# Altium PCB PCB.PcbDoc
Units mm, origin at the board's own origin, x right, y up, seen from the top; angles counter-clockwise.
Board outline 150 x 80 mm, 2 copper layers (Top Layer, Bottom Layer); 43 components, 36 nets, 216 pads, 52 vias.
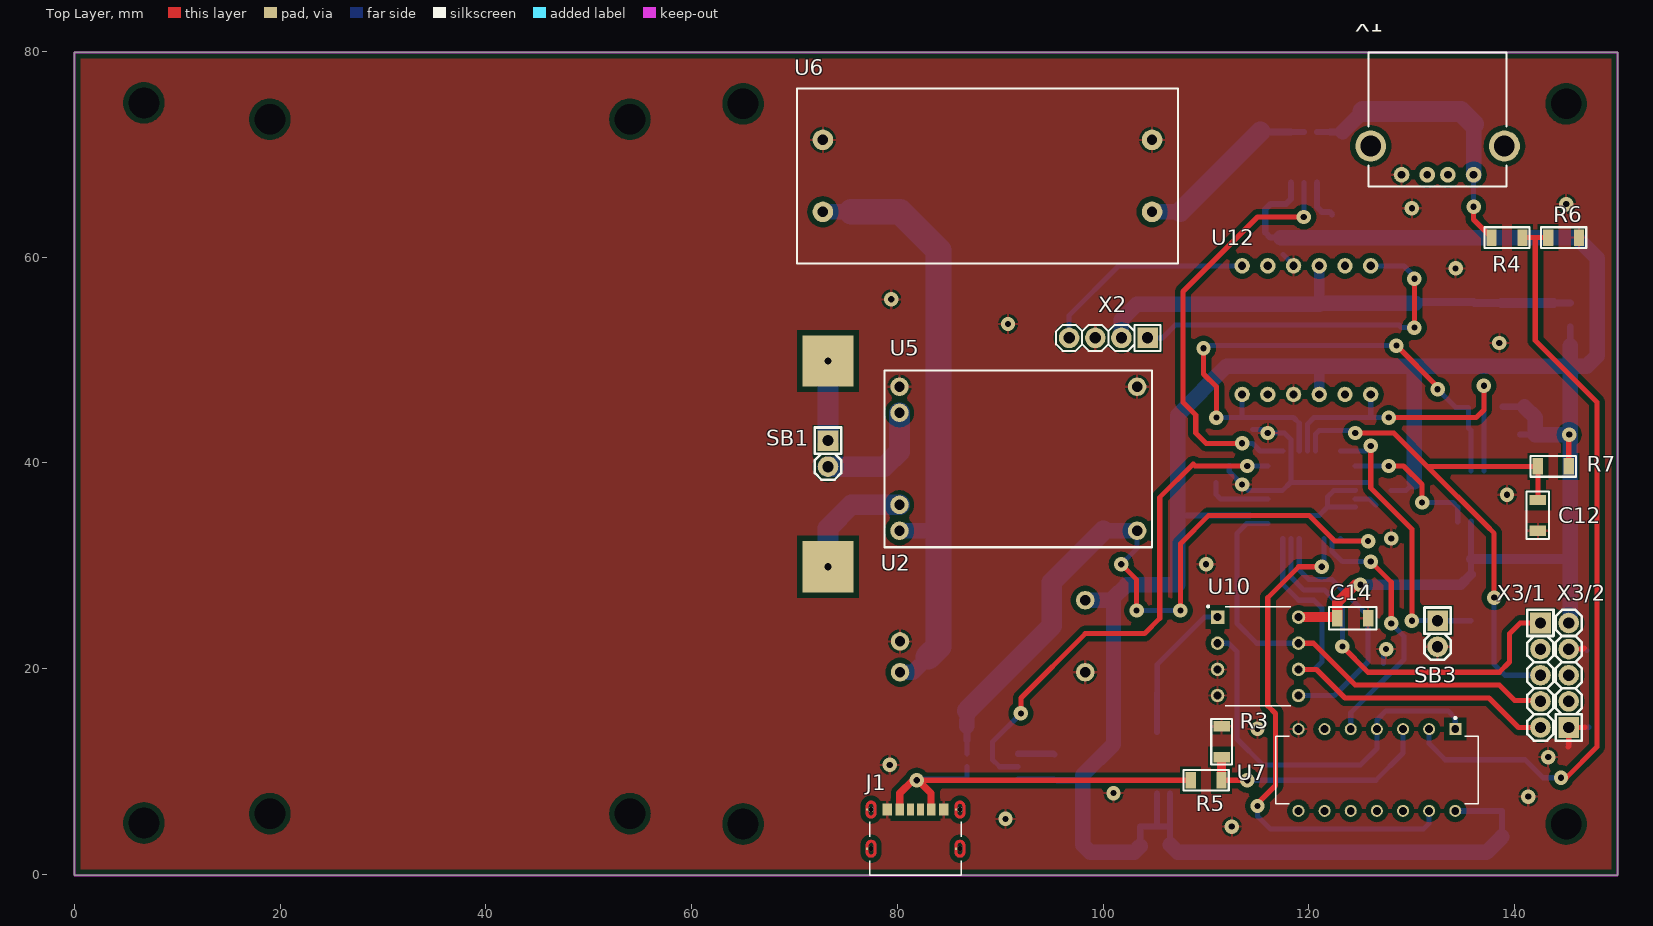
[diagram p0: Top Layer view]
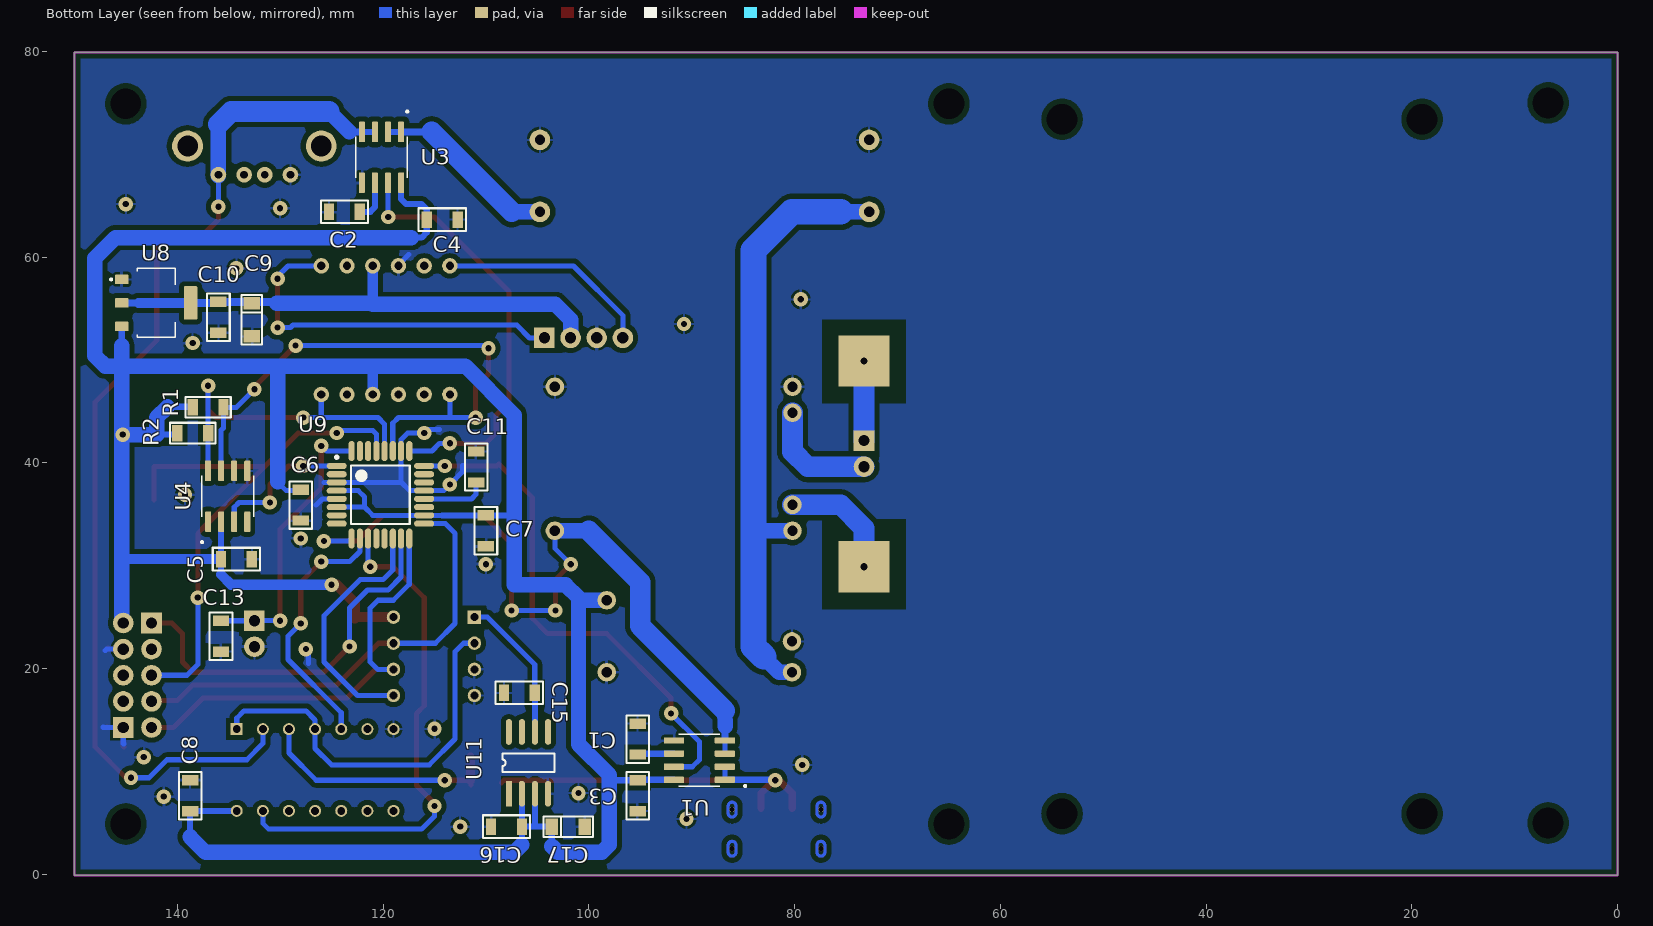
[diagram p1: Bottom Layer view, seen from below]
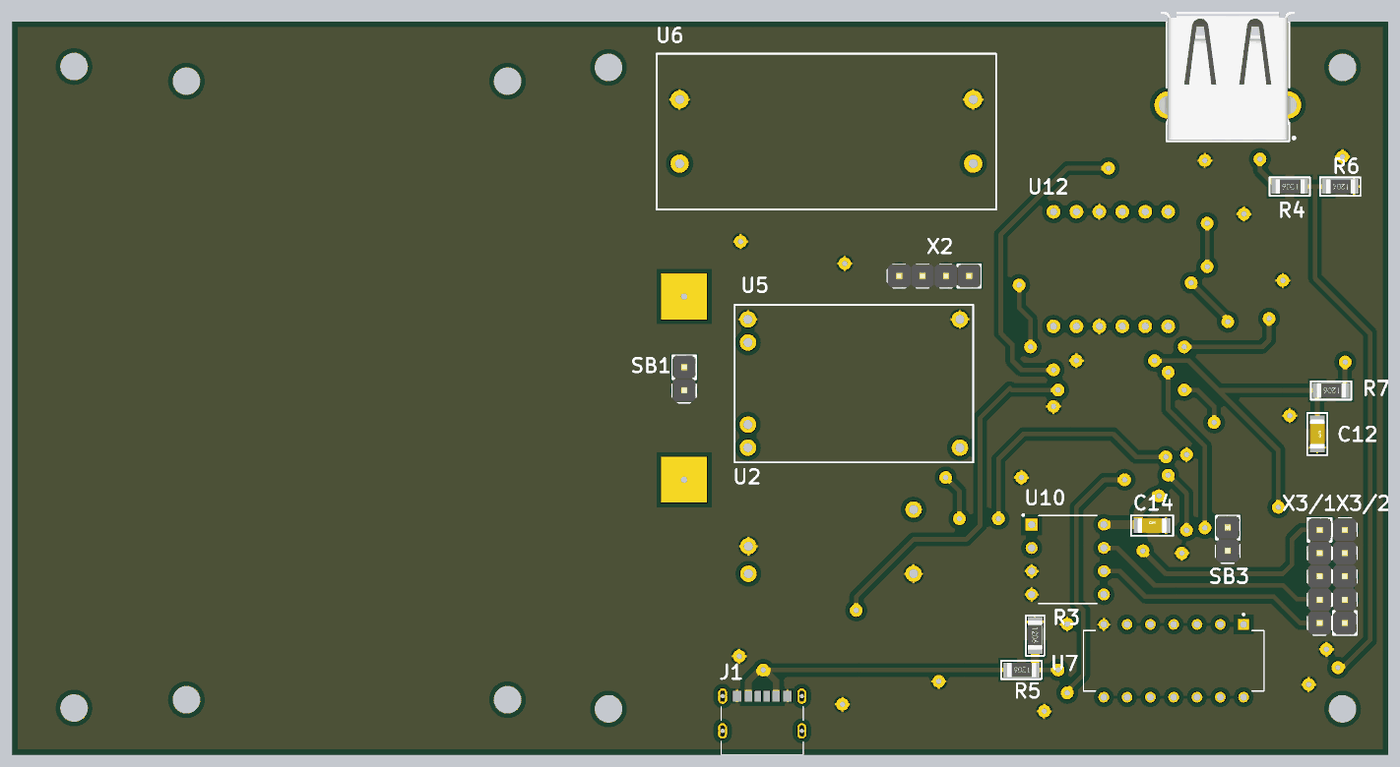
[diagram p2: 3D render of the assembled board from above, using the file's embedded part models]
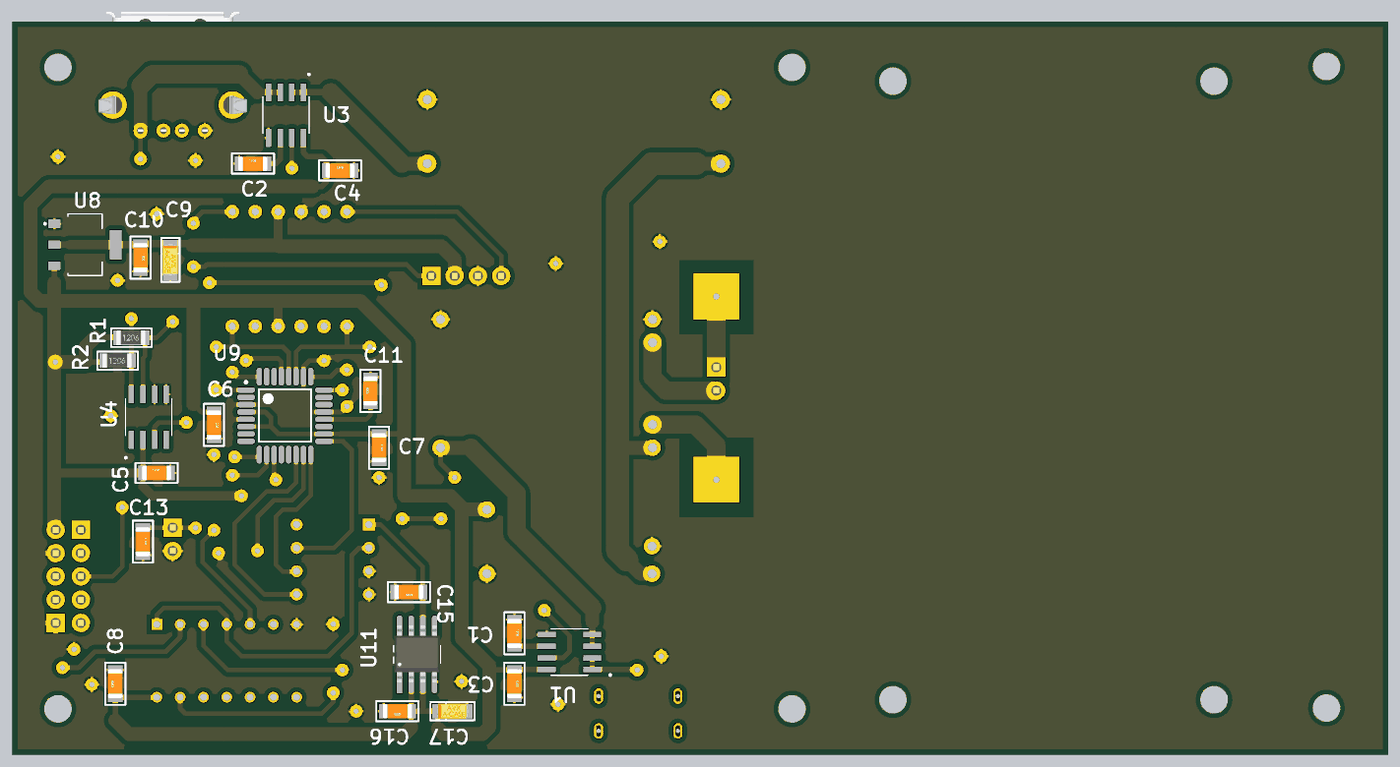
[diagram p3: 3D render of the assembled board from below, using the file's embedded part models]

## Layer stack, top to bottom
Top Solder: solder mask 0.0102, Solder Resist, Dk 3.5
Top Layer: signal copper 0.0356
Dielectric 1: dielectric 0.32, FR-4, Dk 4.8
Bottom Layer: signal copper 0.0356
Bottom Solder: solder mask 0.0102, Solder Resist, Dk 3.5

## Board outline
0,-0.1 150,-0.1 150,79.903 0,79.903

## Design rules (kind name [scope] priority, off if disabled: settings)
Clearance [All] p1: gap=0.1 ignorepadtopadclearanceinfootprint=TRUE except(0.5: Arc-Fill Arc-Poly Arc-Region Track-Fill Track-Poly Track-Region SMDPad-Fill SMDPad-Poly SMDPad-Region THPad-Fill THPad-Poly THPad-Region Via-Fill Via-Poly Via-Region Fill-Fill Fill-Poly Fill-Region Poly-Poly Poly-Region Region-Region)
PolygonConnect [All] p1: connectstyle=Relief reliefconductorwidth=0.254 reliefentries=4 polygonreliefangle="90 Angle" airgapwidth=0.254
RoutingVias [All] p1: holewidth=0.711 width=1.27 viastyle="Through Hole" minholewidth=0.711 minwidth=1.27 maxholewidth=0.711 maxwidth=1.27
SolderMaskExpansion [All] p1: expansion=0.102
Width [All] p1: maxlimit=5 minlimit=0.3 preferedwidth=0.5
30 further rules are at their usual default settings.

## Classes and differential pairs
component class SchemeP1: C1 C2 C3 C4 C5 C6 C7 C8 C10 C11 C12 C13 C14 C15 C17 J1 R1 R2 R3 R4 R5 R6 R7 U1 U2 U3 U4 U5 U6 U7 U8 U9 U10 U11 X1 X2

## Components (designator, comment, footprint, x,y, rotation, side; value= is the part's Value field where it differs from the comment)
C1 "1nF" CH1206C 95.25,13.153 r270 bottom value=0.1uF
C2 "1nF" CH1206C 123.75,64.403 r180 bottom value=0.1uF
C3 "0.1uF" CH1206C 95.25,7.653 r270 bottom
C4 "0.1uF" CH1206C 114.25,63.653 r180 bottom
C5 "0.1uF" CH1206C 134.25,30.653 r180 bottom
C6 "0.1uF" CH1206C 128,35.903 r270 bottom
C7 "0.1uF" CH1206C 110,33.403 r270 bottom
C8 "0.1uF" CH1206C 138.75,7.653 r90 bottom
C9 "Comment" "CAP: TANTAL-A" 132.75,53.903 r270 bottom
C10 "0.1uF" CH1206C 136,54.153 r270 bottom
C11 "0.1uF" CH1206C 110.95,39.603 r90 bottom
C12 "0.1uF" CH1206C 142.25,34.903 r270 top
C13 "0.1uF" CH1206C 135.75,23.153 r270 bottom
C14 "0.1uF" CH1206C 124.25,24.903 r0 top
C15 "0.1uF" CH1206C 106.75,17.653 r0 bottom
C16 "Comment" "CAP: TANTAL-A" 102,4.653 r180 bottom
C17 "0.1uF" CH1206C 108,4.653 r0 bottom
J1 "UJC-HP-3-SMT-TR" CUI_UJC-HP-3-SMT-TR 81.755,6.3 r0 top
R1 "Resistor film, 10k, ±5%, 1206, 0.25W, -55...+125°C" "RES: 1206" 137,45.403 r180 bottom value=10k
R2 "Resistor film, 10k, ±5%, 1206, 0.25W, -55...+125°C" "RES: 1206" 138.5,42.903 r180 bottom value=10k
R3 "Resistor film, 10k, ±1%, 1206, 0.25W, -55...+125°C" "RES: 1206" 110,9.153 r180 top value=10k
R4 "Resistor film, 10k, ±1%, 1206, 0.25W, -55...+125°C" "RES: 1206" 139.25,61.903 r180 top value=10k
R5 "Resistor film, 10k, ±1%, 1206, 0.25W, -55...+125°C" "RES: 1206" 111.5,12.903 r270 top value=10k
R6 "Resistor film, 10k, ±1%, 1206, 0.25W, -55...+125°C" "RES: 1206" 144.75,61.903 r180 top value=10k
R7 "Resistor film, 10k, ±5%, 1206, 0.25W, -55...+125°C" "RES: 1206" 143.75,39.653 r180 top value=10k
SB1 "Comment" "CON: PLS-2" 73.25,40.903 r270 top
SB3 "Comment" "CON: PLS-2" 132.5,23.403 r270 top
U1 "ACS712ELCTR-05B-T" SOIC127P600X175-8N#1 89.25,11.103 r0 bottom
U2 "DC_DC" DC_DC 80.25,22.653 r0 top
U3 "ACS712ELCTR-05B-T" SOIC127P600X175-8N#1 120.15,69.703 r270 bottom
U4 "DS3231MZ+" SOIC127P600X175-8N#2 135.1,36.753 r90 bottom
U5 "Comment" TP4056_module 91.75,40.403 r0 top
U6 "Comment" CONV_RAZ-2405S 102.25,42.803 r180 top
U7 "К176КТ1" DIP794W45P254L1969H508Q14 126.6,10.153 r270 top
U8 "AMS1117-3.3" SOT229P700X180-4N 142.05,55.553 r270 bottom
U9 "ATmega328P-AU" 32A_M 120.25,36.903 r180 bottom
U10 "MCP3201-CI/P" DIP787W46P254L927H533Q8 115.05,21.203 r0 top
U11 "REF192GRUZ" "SOIC_N-8 - duplicate1" 107.77,7.853 r90 bottom
U12 "Comment" Logic_lvl_conv 113.5,46.653 r90 top
X1 "\"USB\"" "CON: USB-A" 132.5,69.403 r180 top
X2 "Connector, 4pin, 2.54mm, 500VAC, 3A" "CON: PLS-4" 100.5,52.153 r180 top
X3/1 "Comment" "CON: PLS-5"#1 142.5,19.363 r270 top
X3/2 "Comment" "CON: PLS-5"#2 145.25,19.363 r90 top

## Footprints (in the part's own frame and the unit in brackets; to place one, negate y for a bottom-side part, rotate by r counter-clockwise, add the part's x,y. Pads: shape width x height; smd on the part's side, far side on the other; paste and mask are expansions set on the pad)
32A_M [mm] "Thin QFP, 32-Leads, Body 7x7mm, Pitch 0.8mm, IPC Low Density"
  oval 1.95x0.6 smd: 1(-4.25,2.8) 2(-4.25,2) 3(-4.25,1.2) 4(-4.25,0.4) 5(-4.25,-0.4) 6(-4.25,-1.2) 7(-4.25,-2) 8(-4.25,-2.8) 17(4.25,-2.8) 18(4.25,-2) 19(4.25,-1.2) 20(4.25,-0.4) 21(4.25,0.4) 22(4.25,1.2) 23(4.25,2) 24(4.25,2.8)
  oval 0.6x1.95 smd: 9(-2.8,-4.25) 10(-2,-4.25) 11(-1.2,-4.25) 12(-0.4,-4.25) 13(0.4,-4.25) 14(1.2,-4.25) 15(2,-4.25) 16(2.8,-4.25) 25(2.8,4.25) 26(2,4.25) 27(1.2,4.25) 28(0.4,4.25) 29(-0.4,4.25) 30(-1.2,4.25) 31(-2,4.25) 32(-2.8,4.25)
  silkscreen extent -4.38,-2.85 2.85,3.77, body extent -3.5,-3.5 3.5,3.5, height 1.2
"CAP: TANTAL-A" [mm]
  rect 1.2x1.6 smd: 1(-1.6,0) 2(1.6,0)
  silkscreen extent -2.4,-1 2.4,1, body extent -1.7,-0.84 1.7,0.84, height 1.71
CH1206C [mm] "Non polar chip capacitor, size 1206"
  rect 1x1.6 smd: 1(-1.5,0) 2(1.5,0)
  silkscreen extent -2.3,-1.1 2.3,1.1, body extent -1.6,-0.8 1.6,0.8, height 1
"CON: PLS-2" [mm]
  rect 2x2 hole 1.1: 1(-1.27,0)
  round 2 hole 1.1: 2(1.27,0)
  silkscreen extent -2.54,-1.27 2.54,1.27, body extent -2.57,-1.28 2.51,1.26, height 8.54
"CON: PLS-4" [mm] "PLS-40 4 pin header"
  rect 2x2 hole 1.1: 1(-3.81,0)
  round 2 hole 1.1: 2(-1.27,0) 3(1.27,0) 4(3.81,0)
  silkscreen extent -5.08,-1.27 5.08,1.27, body extent -5.08,-1.27 5.08,1.27, height 8.54
"CON: PLS-5"#1 [mm]
  rect 2x2 hole 1.1: 1(-5.08,0)
  round 2 hole 1.1: 3(-2.54,0) 5(0,0) 7(2.54,0) 9(5.08,0)
  silkscreen extent -6.35,-1.27 6.35,1.27, body extent -6.35,-1.27 6.35,1.27, height 8.54
"CON: PLS-5"#2 [mm]
  round 2 hole 1.1: 2(5.08,0) 4(2.54,0) 6(0,0) 8(-2.54,0)
  rect 2x2 hole 1.1: 10(-5.08,0)
  silkscreen extent -6.35,-1.27 6.35,1.27, body extent -6.35,-1.27 6.35,1.27, height 8.54
"CON: USB-A" [mm]
  round 1.524 hole 0.762: 1(-3.5,1.397) 2(-1,1.397) 3(1,1.397) 4(3.5,1.397)
  round 3 hole 2: 5(6.5,-1.397) 6(-6.5,-1.397)
  round 0.5 on Mech1: ""(-7.5,1.9)
  round 0.5 on Top Overlay: ""(-7.2,2.2)
  silkscreen extent -6.7,-10.5 6.7,2.55, body extent -8.1,-11.59 8.13,2.41, height 7.66
CONV_RAZ-2405S [mm]
  round 2 hole 1: 1(29.5,-21.6) 2(-2.5,-21.6) 3(-2.5,-28.6) 4(29.5,-28.6)
  silkscreen extent -5,-33.6 32,-16.6
CUI_UJC-HP-3-SMT-TR [mm]
  rect 0.7x1.15 smd: A5(-0.5,0) B5(0.5,0)
  rect 0.8x1.15 smd: A9(1.52,0) B9(-1.52,0)
  rect 0.9x1.15 smd: A12(2.75,0) B12(-2.75,0)
  rect 0.2x0.2 smd paste-1 mask+0: S1(-4.695,0) S2(3.945,0) S3(-4.695,-3.8) S4(3.945,-3.8)
  round 0.5 hole 0.5 unplated: ""(-4.32,-3.8) ""(-4.32,0) ""(4.32,-3.8) ""(4.32,0)
  Top Layer region: 249 vertices and 0 holes, not listed, extent -4.82,-0.85 -3.82,0.85
  Top Layer region: 249 vertices and 0 holes, not listed, extent 3.82,-0.85 4.82,0.85
  Top Layer region: 249 vertices and 0 holes, not listed, extent -4.82,-4.65 -3.82,-2.95
  Top Layer region: 249 vertices and 0 holes, not listed, extent 3.82,-4.65 4.82,-2.95
  Bottom Layer region: 249 vertices and 0 holes, not listed, extent -4.82,-0.85 -3.82,0.85
  Bottom Layer region: 249 vertices and 0 holes, not listed, extent 3.82,-0.85 4.82,0.85
  Bottom Layer region: 249 vertices and 0 holes, not listed, extent -4.82,-4.65 -3.82,-2.95
  Bottom Layer region: 249 vertices and 0 holes, not listed, extent 3.82,-4.65 4.82,-2.95
  silkscreen extent -4.47,-6.4 4.47,-1.17
DC_DC [mm]
  round 1.8 hole 1: 1(0,0) 2(0,-3) 3(18,-3) 4(18,4)
DIP787W46P254L927H533Q8 [mm]
  rect 1.308x1.308 hole 0.8: 1(-3.935,3.81)
  round 1.308 hole 0.8: 2(-3.935,1.27) 3(-3.935,-1.27) 4(-3.935,-3.81) 5(3.935,-3.81) 6(3.935,-1.27) 7(3.935,1.27) 8(3.935,3.81)
  silkscreen extent -4.95,-4.8 3.18,4.95
DIP794W45P254L1969H508Q14 [mm]
  rect 1.17x1.17 hole 0.77: 1(-3.97,7.62)
  round 1.17 hole 0.77: 2(-3.97,5.08) 3(-3.97,2.54) 4(-3.97,0) 5(-3.97,-2.54) 6(-3.97,-5.08) 7(-3.97,-7.62) 8(3.97,-7.62) 9(3.97,-5.08) 10(3.97,-2.54) 11(3.97,0) 12(3.97,2.54) 13(3.97,5.08) 14(3.97,7.62)
  silkscreen extent -5.15,-9.84 3.3,9.84
Logic_lvl_conv [mm]
  round 1.5 hole 0.8: 1(0,0) 2(0,-2.5) 3(0,-5) 4(0,-7.5) 5(0,-10) 6(0,-12.5) 7(12.5,-12.5) 8(12.5,-10) 9(12.5,-7.5) 10(12.5,-5) 11(12.5,-2.5) 12(12.5,0)
"RES: 1206" [mm]
  rect 1x1.6 smd: 1(-1.5,0) 2(1.5,0)
  silkscreen extent -2.2,-1 2.2,1, body extent -1.65,-0.8 1.55,0.8, height 0.47
SOIC127P600X175-8N#1 [mm]
  rrect25% 1.97x0.6 smd: 1(-2.475,1.905) 2(-2.475,0.635) 3(-2.475,-0.635) 4(-2.475,-1.905) 5(2.475,-1.905) 6(2.475,-0.635) 7(2.475,0.635) 8(2.475,1.905)
  silkscreen extent -4.54,-2.52 2,2.6
SOIC127P600X175-8N#2 [mm]
  rrect25% 1.97x0.59 smd: 1(-2.475,1.905) 2(-2.475,0.635) 3(-2.475,-0.635) 4(-2.475,-1.905) 5(2.475,-1.905) 6(2.475,-0.635) 7(2.475,0.635) 8(2.475,1.905)
  silkscreen extent -4.54,-2.52 2,2.59
"SOIC_N-8 - duplicate1" [mm]
  rect 2.5x0.6 smd: 1(0,0)
  oval 2.5x0.6 smd: 2(0,-1.27) 3(0,-2.54) 4(0,-3.81) 5(6,-3.81) 6(6,-2.54) 7(6,-1.27) 8(6,0)
  silkscreen extent 2.08,-4.44 3.92,0.63, body extent -0.05,-4.4 6.15,0.6, height 1.75
SOT229P700X180-4N [mm]
  rrect15% 0.93x1.31 smd: 1(-2.29,-3.345) 2(0,-3.345) 3(2.29,-3.345)
  rrect15% 3.24x1.31 smd: 4(0,3.345)
  silkscreen extent -3.36,-4.47 3.36,1.86
TP4056_module [mm]
  round 1.8 hole 1: 1(11.55,7) 2(-11.55,7) 3(-11.55,4.475) 4(-11.55,-4.475) 5(-11.55,-7) 6(11.55,-7)
  silkscreen extent -13,-8.6 13,8.6

## Part data
C1 C2 C3 C4 C5 C6 C7 C8 C10 C11 C12 C13 C14 C15 C17: library part Capacitor
J1: "Type C, 3 A, Right Angle, Surface Mount _SMT_, Power Only USB Receptacle", Package=Package, Availability=Unavailable, MF="CUI Devices", MP=UJC-HP-3-SMT-TR, Price=None, SnapEDA_Link=https://www.snapeda.com/parts/UJC-HP-3-SMT-TR/CUI%20Devices/view-part/4722774/?ref=snap
R1 R2 R7: library part Resistor_1206, Manufacturer=Yageo, Package=1206, PartNumber=RC1206JR-07100RL, Power=0.25W, Temperature=-55...+125°C, Tolerance=±5%, TypeResistor="Resistor film", HelpURL=https://www.digikey.com/product-detail/en/yageo/RC1206JR-07100RL/311-100ERCT-ND/732153, ValueManufacturerPartNumber="Resistor film, 10k, ±5%, 1206, 0.25W, -55...+125°C"
R3 R4 R5 R6: library part Resistor_1206, Manufacturer=Yageo, Package=1206, PartNumber=RC1206JR-07100RL, Power=0.25W, Temperature=-55...+125°C, Tolerance=±1%, TypeResistor="Resistor film", HelpURL=https://www.digikey.com/product-detail/en/yageo/RC1206JR-07100RL/311-100ERCT-ND/732153, ValueManufacturerPartNumber="Resistor film, 10k, ±1%, 1206, 0.25W, -55...+125°C"
U1 U3: "Current Sensor 5A 1 Channel Hall Effect, Open Loop Bidirectional 8-SOIC _0.154, 3.90mm Width_", Package="SOIC-8 Allegro MicroSystems LLC", Digi-Key_Part_Number=620-1189-1-ND, Digi-Key_Purchase_URL=https://www.digikey.in/product-detail/en/allegro-microsystems/ACS712ELCTR-05B-T/620-1189-1-ND/1284606?utm_source=snapeda&utm_medium=aggregator&utm_campaign=symbol, MF="Allegro MicroSystems LLC", MP=ACS712ELCTR-05B-T, SnapEDA_Link=https://www.snapeda.com/parts/ACS712ELCTR-05B-T/Allegro%20MicroSystems%20LLC/view-part/46765/?ref=snap
U4: "Real Time Clock _RTC_ IC Clock/Calendar IA?C, 2-Wire Serial 8-SOIC _0.154, 3.90mm Width_", Package="SOIC-8 Maxim Integrated", Availability=Unavailable, MF="Maxim Integrated", MP=DS3231MZ, Price=None, SnapEDA_Link=https://www.snapeda.com/parts/DS3231MZ/Maxim%20Integrated/view-part/2834343/?ref=snap
U7: library part CD4016BE, "100-pA, 20-V, 1:1 (SPST), 4-channel analog switch 14-PDIP -55 to 125", Package="PDIP-14 Texas Instruments", Availability=Good, DigiKey-Purchase-URL=https://snapeda.com/shop?store=DigiKey&id=339386, MF="Texas Instruments", Mouser-Purchase-URL=https://snapeda.com/shop?store=Mouser&id=339386, MP=CD4016BE, Price=None, SnapEDA_Link=https://www.snapeda.com/parts/CD4016BE/Texas%20Instruments/view-part/339386/?ref=snap, Texas_Instruments-Purchase-URL=https://snapeda.com/shop?store=Texas+Instruments&id=339386
U8: "Sot223/Pkg 1-Amp 3.3-Volt Low Drop Out Voltage Regulatator", Package=None, Availability=Unavailable, MF="Advanced Monolithic Systems", MP=AMS1117-3.3, Price=None, SnapEDA_Link=https://www.snapeda.com/parts/AMS1117-3.3/Advanced%20Monolithic%20Systems/view-part/53450/?ref=snap
U9: "8-bit AVR Microcontroller, 32KB Flash, 1KB EEPROM, 2KB SRAM, 32-pin TQFP, Industrial Grade (-40°C to 85°C)", Supplier Part Number 1=ATMEGA328P-AU-ND, Code_JEDEC=MS-026-ABA, ComponentLink1Description="Manufacturer Link", ComponentLink1URL=http://www.atmel.com/products/avr/default.asp?, ComponentLink2Description="ATmega48A/48PA/88A/88PA/168A/168PA/328/328P Datasheet", ComponentLink2URL=http://www.atmel.com/dyn/resources/prod_documents/8271.pdf, ComponentLink3Description="ATmega48A/48PA/88A/88PA/168A/168PA/328/328P Summary", ComponentLink3URL=http://www.atmel.com/dyn/resources/prod_documents/8271S.pdf, ComponentLink4Description="Atmel.com Home", ComponentLink4URL=http://www.atmel.com, DatasheetVersion="revA, Jan-2010", PackageDescription="32-Lead, 7x7x1.0 mm Body, 0.8mm Lead Pitch, Thin Profile Plastic Quad Flat Package (TQFP)", PackageReference=32A, PackageVersion="revB, Oct-2001", Published=1-Apr-2010, Publisher="Altium Limited", Supplier 1=Digi-Key, Supplier 2=Farnell, Supplier 3=Mouser, Supplier Part Number 2=1715486, Supplier Part Number 3=556-ATMEGA328P-AU
U10: "12 Bit Analog to Digital Converter 1 Input 1 SAR 8-PDIP", Package="DIP-8 Microchip", Availability=Unavailable, MF=Microchip, MP=MCP3201-CI/P, Price=None, SnapEDA_Link=https://www.snapeda.com/parts/MCP3201-CI/P/Microchip/view-part/228355/?ref=snap
U11: "Series Voltage Reference IC A±0.4% 8-TSSOP", Package="TSSOP-8 Analog Devices", Availability=Unavailable, DigiKey-Purchase-URL=https://snapeda.com/shop?store=DigiKey&id=281738, MF="Analog Devices", MP=REF192GRUZ, Price=None, SnapEDA_Link=https://www.snapeda.com/parts/REF192GRUZ/Analog%20Devices%20Inc./view-part/281738/?ref=snap
X1: library part USB-A, "USB", Manufacturer="TE Connectivity", ComponentKind="type A", HelpURL=https://www.digikey.com/product-detail/en/te-connectivity-amp-connectors/292303-2/A105221-ND/953990, Model=292303-2
X2: library part PLS-4, CurrentMax=3A, Manufacturer=Connfly, VoltageMax=500VAC, CommentText="\"Display", HelpURL=https://www.chipdip.ru/product/pls-4, Multichannel=4pin, PartNumber=PLS-4, Pitch=2.54mm, TypeConnector=Connector, ValueManufacturerPartNumber="Connector, 4pin, 2.54mm, 500VAC, 3A"

## Free pads (board coordinates)
  round 1.8 hole 3: 5(54,5.903) 5(54,73.403) 6(19,5.903) 6(19,73.403)
  rect 5x5 hole 0.7: 7(73.25,49.903) 8(73.25,29.903)
  round 1.5 hole 3: 9(6.75,5) 10(6.75,75) 11(145,74.903) 12(145,4.903) 13(65,4.903) 14(65,74.903)

## Via types
v1: diameter 1.4, hole 0.6, Top Layer to Bottom Layer, 52 vias

## Nets (pads, with @x,y where several pads share a name; then routed paths per layer and width w, separated by ;. In a path a pad name is that pad's centre, name@x,y a point inside that pad or via, vN(x,y) a via of type N, cw(c..) or ccw(c..) an arc to the next point about the centre after c; other vN are vias at no path point)
1Hz_Wave: U4.3 U9.1 | length 14.4
  Top Layer w0.5: v1(127.75,39.703) 129.2,39.703 131,37.903 v1(131,36.153)
  Bottom Layer w0.5: U9.1 v1(127.75,39.703) ; v1(131,36.153) 131,35.903 131.25,36.153 134,36.153 134.465,35.688 U4.3
+3.3V: C9.1 C10.1 U8.2 U8.4 U12.9 X2.2 | length 49.8
  Bottom Layer w0.35: C10.1 C10.1@136.1,55.553
  Bottom Layer w0.7: 143.75,55.553 U8.2
  Bottom Layer w0.8: 130.35,55.653 C10.1 ; C10.1@136.1,55.553 U8.4
  Bottom Layer w1: 121,55.403 121,55.503 U12.9 ; U8.4 143.75,55.553
  Bottom Layer w1.5: X2.2 101.77,53.923 103.25,55.403 121,55.403 ; 121,55.503 130.35,55.503
+5V: C3.1 C4.1 C5.1 C6.1 C7.1 C8.1 C14.1 C16.1 C17.1 R1.1 R2.1 R7.1 U1.8 U2.4 U3.8 U4.2 U7.14 U8.3 U9.4 U9.6 U9.18 U10.8 U11.2 U11.3 U12.4 X3/2.2 | length 322.7
  Top Layer w0.5: R7.1 145.25,42.708 v1(145.295,42.753)
  Top Layer w1: U10.8 C14.1@122.75,25.013 ; C14.1 C14.1@122.75,25.013 ; v1(125,28.153) 124.5,28.153 122.75,26.403 C14.1@122.75,25.013
  Bottom Layer w0.35: C3.1@95.205,9.198 C3.1 ; 105.23,4.673 105.25,4.653 ; U9.4 U9.4@124.571,37.374 ; C5.1@135.7,30.753 C5.1@135.735,30.788 ; v1(145.295,42.753) v1@145.395,42.653
  Bottom Layer w0.5: 114.25,34.903 U9.18 121,34.903 121.8,35.703 ; U9.6 121.8,35.703 ; U9.4 122.4,37.303 121.8,36.703 121.8,35.703 ; C6.1@128,37.303 129.4,37.303 130.25,38.153 ; U7.14 U7.14@134.25,6.153 ; 144.895,49.403 145.395,48.903
  Bottom Layer w0.6: U1.8 C3.1@95.205,9.198 ; C3.1@95.5,9.153 97.5,9.153 ; 103.6,2.753 C16.1 105.25,4.653 C17.1 ; 105.23,4.673 U11.3 ; 106.5,2.903 C17.1 ; U11.2 C17.1 ; 107.25,34.903 C7.1 110.95,34.903 114.25,34.903 ; 117.25,61.903 116.25,61.903 115.75,62.403 C4.1 115.75,64.653 116.25,65.153 117.75,65.153 118.245,65.648 U3.8 ; U7.14@134.25,6.153 C8.1 138.75,3.653 ; C5.1@135.735,30.788 U4.2 ; 135.75,29.153 C5.1 ; R1.1@138.8,45.453 140.95,45.453 ; 140.5,42.753 142,42.753 ; 145.395,51.403 U8.3
  Bottom Layer w1: U12.4 121,49.403 ; v1(125,28.153) 134.75,28.153 135.75,29.153 ; C5.1 145.395,30.653
  Bottom Layer w1.5: U2.4 101,26.653 101,12.653 98,9.653 98,2.903 98.75,2.153 103,2.153 103.6,2.753 ; 101,26.903 102.25,28.153 107.25,28.153 107.25,34.903 107.25,44.653 112,49.403 121,49.403 130.25,49.403 ; 106.5,2.903 107.25,2.153 137.25,2.153 138.75,3.653 ; 117.25,61.903 146,61.903 148,59.903 148,50.403 147,49.403 145.395,49.403 145.395,51.403 ; 130.25,38.153 130.25,49.403 ; 140.95,45.453 142,44.403 142,42.753 v1(145.295,42.753) ; 144.895,49.403 130.25,49.403 ; X3/2.2@145.395,24.443 145.395,30.653 145.395,42.653 145.395,48.903
BAT+: pad.8 U5.4 | length 11.6
  Bottom Layer w2: pad.8 73.25,33.653 75.525,35.928 U5.4
BAT-: pad.7 SB1.1 | length 7.7
  Bottom Layer w2: SB1.1 pad.7
CLK: 
CS: U9.14 U10.5 | length 24.2
  Bottom Layer w0.5: U10.5 122.49,17.393 125.75,20.653 125.75,25.153 122.25,28.653 120,28.653 119.05,29.603 U9.14
GND: C1.1 C2.1 C3.2 C4.2 C5.2 C6.2 C7.2 C8.2 C9.2 C10.2 C11.2 C12.2 C13.2 C14.2 C15.2 C16.2 C17.2 J1.A12 J1.B12 R5.1 R6.1 SB3.2 U1.5 U2.1 U2.3 U3.5 U4.5 U4.6 U5.1 U5.2 U6.3 U6.4 U7.7 U8.1 U9.3 U9.5 U9.21 U9.26 U10.3 U10.4 U11.4 U12.3 U12.10 X1.4 X2.3 X3/2.4 X3/2.10 | length 39.1
  Top Layer w0.5: 145.2,12.4 145.25,12.45 X3/2.10 146.783,14.283 146.8,14.3 ; X3/2.4 146.653,21.903 146.75,22
  Bottom Layer w0.5: 112.25,39.75 112.25,39.153 v1(113.5,37.903) 114.1,37.303 U9.21 117.4,37.303 118.25,38.153 ; 114.5,43.25 115.653,43.25 v1(116,42.903) 117.6,42.903 118.25,42.253 U9.26 118.25,38.153 ; 117.5,60.25 118.5,59.25 U12.10 ; U9.5 125.9,36.503 126.5,35.903 ; 125.73,38.103 U9.3 118.3,38.103 118.25,38.153 ; 127.253,20.5 127.253,21.656 v1(127.5,21.903) ; 145.2,12.7 145.25,12.75 X3/2.10 147.183,14.283 147.2,14.3 ; X3/2.4 146.847,21.903 147,21.75
  other v1: 112.5,4.653 90.5,5.403 141.314,7.566 101,7.903 79.25,10.653 143.25,11.403 115,14.153 110,30.153 128,32.653 139.25,36.903 138.5,51.653 90.75,53.5 79.4,55.9 134.25,58.903 130,64.75 145,65.153
I_IN: U1.7 U9.24 | length 50.3
  Top Layer w0.5: v1(92,15.653) 92,17.153 98.25,23.403 104,23.403 105.5,24.903 105.5,36.653 108.75,39.903 108.95,39.703 v1(114,39.703)
  Bottom Layer w0.5: U1.7 89.935,10.468 89.25,11.153 89.25,12.903 v1(92,15.653) ; v1(114,39.703) U9.24
I_OUT: U3.7 U9.25 | length 41.1
  Top Layer w0.5: v1@113.25,41.903 110,41.903 109,42.903 109,44.653 107.75,45.903 107.75,56.653 115,63.903 v1(119.5,63.903)
  Bottom Layer w0.5: v1(113.5,41.903) 114.5,41.903 115.25,41.153 U9.25 ; v1@119.25,64.153 119.515,64.418 U3.7
IN_SW: U7.5 U9.10 | length 25.2
  Top Layer w0.5: v1(126,30.403) 128,28.403 v1(128,24.403)
  Bottom Layer w0.5: U9.10 122.25,31.403 123.25,30.403 v1(126,30.403) ; U7.5 124.06,15.713 129.25,20.903 129.25,23.153 v1(128,24.403)
INPUT_SENS_PIN: U1.3 U1.4 U5.6 U9.9 | length 73.4
  Top Layer w0.5: v1(101.75,30.153) 103.25,28.653 v1(103.25,25.653) ; v1(107.5,25.653) 107.5,32.153 110.25,34.903 120,34.903 122.5,32.403 v1(125.75,32.403)
  Bottom Layer w0.5: U1.3 U1.4 ; v1(101.75,30.153) 103.3,31.703 U5.6 ; v1(103.25,25.653) v1(107.5,25.653) ; U9.9 123.3,32.403 v1(125.75,32.403)
  Bottom Layer w0.7: 86.75,14.403 U1.4
  Bottom Layer w1.5: 86.75,14.403 86.775,15.928 ; 100,33.403 U5.6
  Bottom Layer w2: 86.775,15.928 95,24.153 95,28.403 100,33.403
MISO: U9.16 U10.6 X3/1.9 | length 42.9
  Top Layer w0.5: U10.6 120.72,19.933 123.5,17.153 137.5,17.153 140.37,14.283 X3/1.9
  Bottom Layer w0.5: U9.16 117.45,28.203 119,26.653 120.5,26.653 121.25,25.903 121.25,20.653 120.5,19.903 119.015,19.903 U10.6
MOSI: U9.15 X3/1.1 | length 37.6
  Top Layer w0.5: v1(123.25,22.153) 125.75,19.653 138.5,19.653 139.5,20.653 139.5,23.403 140.54,24.443 X3/1.1
  Bottom Layer w0.5: U9.15 118.25,28.903 119.5,27.653 121.5,27.653 123.25,25.903 v1(123.25,22.153)
NetBT1_1: 
NetBT1_2: 
NetC1_2: C1.2 U1.6 | length 3.6
  Bottom Layer w0.6: U1.6 95.165,11.738 C1.2
NetC2_2: C2.2 U3.6 | length 4.1
  Bottom Layer w0.6: U3.6 120.785,64.868 121.25,64.403 122,64.403 C2.2@122.25,64.153
NetC11_1: C11.1 U9.20 | length 6.4
  Bottom Layer w0.5: C11.1 110.95,36.953 111.4,36.503 U9.20
NetC15_1: C15.1 U10.1 U11.6 | length 14.3
  Bottom Layer w0.35: C15.1@105.23,17.633 C15.1
  Bottom Layer w0.5: C15.1 105.25,20.403 109.86,25.013 U10.1
  Bottom Layer w0.6: U11.6 C15.1@105.23,17.633
NetR3_1: R3.1 R5.2 U7.3 | length 23.3
  Top Layer w0.5: R3.1 v1(114,9.153)
  Top Layer w0.9: R3.1 R5.2
  Bottom Layer w0.5: v1(114,9.153) 126.5,9.153 129.14,11.793 U7.3
NetR4_1: R4.1 R6.2 U7.2 | length 74.8
  Top Layer w0.5: R4.1 142,61.903 ; R6.2 142,61.903 ; v1(144.5,9.403) 145,9.403 148,12.403 148,45.903 142,51.903 142,61.903
  Bottom Layer w0.5: U7.2 131.68,12.723 133.25,11.153 141,11.153 142.75,9.403 v1(144.5,9.403)
NetR4_2: U3.1 U3.2 U6.2 | length 18
  Bottom Layer w0.6: U3.1 U3.2
  Bottom Layer w0.7: 115.275,72.178 U3.1
  Bottom Layer w1.5: U6.2 107.5,64.403
  Bottom Layer w2: 107.5,64.403 115.275,72.178
NetSB1_1: SB1.2 U5.3 | length 11.3
  Bottom Layer w2: SB1.2 78.73,39.633 80.2,41.103 U5.3
NetU2_2: U2.2 U5.5 U6.1 | length 59.9
  Bottom Layer w1.5: U6.1 75.5,64.403 ; U5.5 84,33.403 ; U2.2 81.5,19.653 83,21.153
  Bottom Layer w2.5: 75.5,64.403 80.25,64.403 84,60.653 84,33.403 84,22.153 83,21.153
NetU3_1: R4.2 U3.3 U3.4 X1.1 | length 28.3
  Top Layer w0.5: v1(136,64.903) 136,63.653 R4.2
  Bottom Layer w0.5: v1(136,64.903) X1.1@136,67.903
  Bottom Layer w0.6: U3.3 U3.4
  Bottom Layer w0.7: U3.4 123.275,72.178
  Bottom Layer w1.5: 123.275,72.178 125.25,74.153 ; X1.1@136,67.903 X1.1 136,72.903
  Bottom Layer w2: 125.25,74.153 134.75,74.153 136,72.903
NetU7_2: U7.1 U7.4 U10.2 | length 38.1
  Bottom Layer w0.5: U10.2 112.18,22.473 113,21.653 113,13.153 115.5,10.653 125,10.653 126.6,12.253 U7.4 126.6,15.003 127.5,15.903 133.5,15.903 134.22,15.183 U7.1
OUT_SW: U7.13 U9.11 | length 50
  Top Layer w0.5: v1@115,6.903 116.75,8.653 116.75,15.653 116,16.403 116,26.903 119,29.903 v1(121.25,29.903)
  Bottom Layer w0.5: v1(115,6.653) 115,5.653 116.25,4.403 131.11,4.403 131.68,4.973 U7.13 ; v1(121.25,29.903) 121.45,30.103 U9.11
RESET: C12.1 R7.2 U9.29 X3/1.5 | length 55
  Top Layer w0.5: v1(124.5,42.903) 128.25,42.903 131.5,39.653 ; v1(138,26.903) 138,33.153 137.25,33.903 131.5,39.653 ; C12.1 R7.2 131.5,39.653
  Bottom Layer w0.5: U9.29 120.65,42.803 121,43.153 124.25,43.153 v1(124.5,42.903) ; v1(138,26.903) 138,20.403 139.04,19.363 X3/1.5
SCK: U9.17 U10.7 X3/1.7 | length 44.8
  Top Layer w0.5: U10.7 120.43,22.473 124.5,18.403 138.5,18.403 140,16.903 142.42,16.903 X3/1.7
  Bottom Layer w0.5: U9.17 113.95,34.103 113,33.153 113,24.403 114.93,22.473 U10.7
SCL: R2.2 U4.8 U9.28 U12.6 | length 33.2
  Top Layer w0.5: v1(127.75,44.403) 136.25,44.403 137,45.153 v1(137,47.5)
  Bottom Layer w0.5: U9.28 119.85,43.753 120.5,44.403 126,44.403 ; U12.6 126,44.403 ; v1(127.75,44.403) 126,44.403 ; R2.2 v1(137,47.5) ; U4.8 R2.2@137.005,42.903
SCL_OLED: U12.7 X2.1 | length 36.4
  Top Layer w0.5: v1(130.25,53.153) v1(130.25,57.903) v1@130.25,58.153
  Bottom Layer w0.5: X2.1 105.75,52.153 107,53.403 128.75,53.403 129,53.153 v1(130.25,53.153) ; U12.7 129.25,59.153 v1@130.375,58.028
SDA: R1.2 U4.7 U9.27 U12.1 | length 54.6
  Top Layer w0.5: v1(109.75,51.153) 109.75,48.653 111,47.403 111,45.153 ; v1(128.5,51.403) 132.5,47.403 v1(132.5,47.153)
  Bottom Layer w0.5: v1(109.75,51.153) 109.75,51.403 v1(128.5,51.403) ; v1(111,44.403) 113.5,44.403 ; U12.1 113.5,44.403 ; U9.27 119.05,43.853 118.5,44.403 113.5,44.403 ; v1(132.5,47.153) 134.25,45.403 R1.2 135.5,43.403 135.735,43.168 U4.7
SDA_OLED: U12.12 X2.4 | length 21.1
  Bottom Layer w0.5: X2.4 96.69,54.343 101.5,59.153 113.25,59.153 U12.12@113.5,58.903
SW_BTN: C13.1 SB3.1 U9.32 | length 27.8
  Top Layer w0.5: v1(126,41.653) 126,37.553 130,33.553 v1(130,24.653)
  Bottom Layer w0.5: U9.32 125.5,41.153 v1(126,41.653) v1@126,41.403 ; v1(130,24.653) 130.02,24.673 SB3.1 132.52,24.653 C13.1
Uin: J1.A9 J1.B9 R3.2 U1.1 U1.2 | length 39.8
  Top Layer w0.35: v1@81.5,9.153 v1(81.875,9.153)
  Top Layer w0.5: v1(81.875,9.153) 82,9.153 108.25,9.153 R3.2@108.5,8.903
  Top Layer w0.7: J1.B9@80.23,6.403 80.23,7.883 v1@81.5,9.153 ; v1@82,9.153 83.27,7.883 J1.A9@83.27,6.403
  Bottom Layer w0.35: v1(81.875,9.153) v1@82.25,9.153
  Bottom Layer w0.5: U1.1 U1.2
  Bottom Layer w0.6: v1@82.295,9.198 U1.1
pads on no net: J1. J1.A5 J1.B5 J1.S1 J1.S2 J1.S3 J1.S4 U4.1 U4.4 U7.6 U7.8 U7.9 U7.10 U7.11 U7.12 U9.2 U9.7 U9.8 U9.12 U9.13 U9.19 U9.22 U9.23 U9.30 U9.31 U11.1 U11.5 U11.7 U11.8 U12.2 U12.5 U12.8 U12.11 X1. X1.2 X1.3 X1.5 X1.6 X3/1.3 X3/2.6 X3/2.8

## Polygon pours and split planes (outlines as drawn)
GND on Top Layer "TL" (solid, remove dead copper, pour order 0): 0,80 150,79.903 150,-0.1 0,-0.1
GND on Bottom Layer "BL" (solid, remove dead copper, pour order 2): 0,79.903 150,79.903 150,-0.1 0,-0.1

## Keep-outs
Keep-Out Layer:
  the board outline again, w0.2

## Other copper
Bottom Layer:
  pour cut-out: 69.2,34.5 77.3,34.5 77.3,25.8 69.2,25.8
  pour cut-out: 69.2,53.9 77.3,53.9 77.3,45.8 69.2,45.8

## Silkscreen, mask and mechanical layers (free items; w line width, h text height)
Mechanical 15:
  lines w2: 3,11.903 68,11.903 68,66.903 3,66.903 3,11.903